# Altium PCB Master.PcbDoc (part 4 of 4)
Units mm, origin at the board's own origin, x right, y up, seen from the top; angles counter-clockwise.
Board outline 150 x 100 mm, 4 copper layers (Top Layer, GND-Layer, PWR-Layer, Bottom Layer), stack 1.586 mm thick; 231 components, 152 nets, 715 pads, 841 vias.
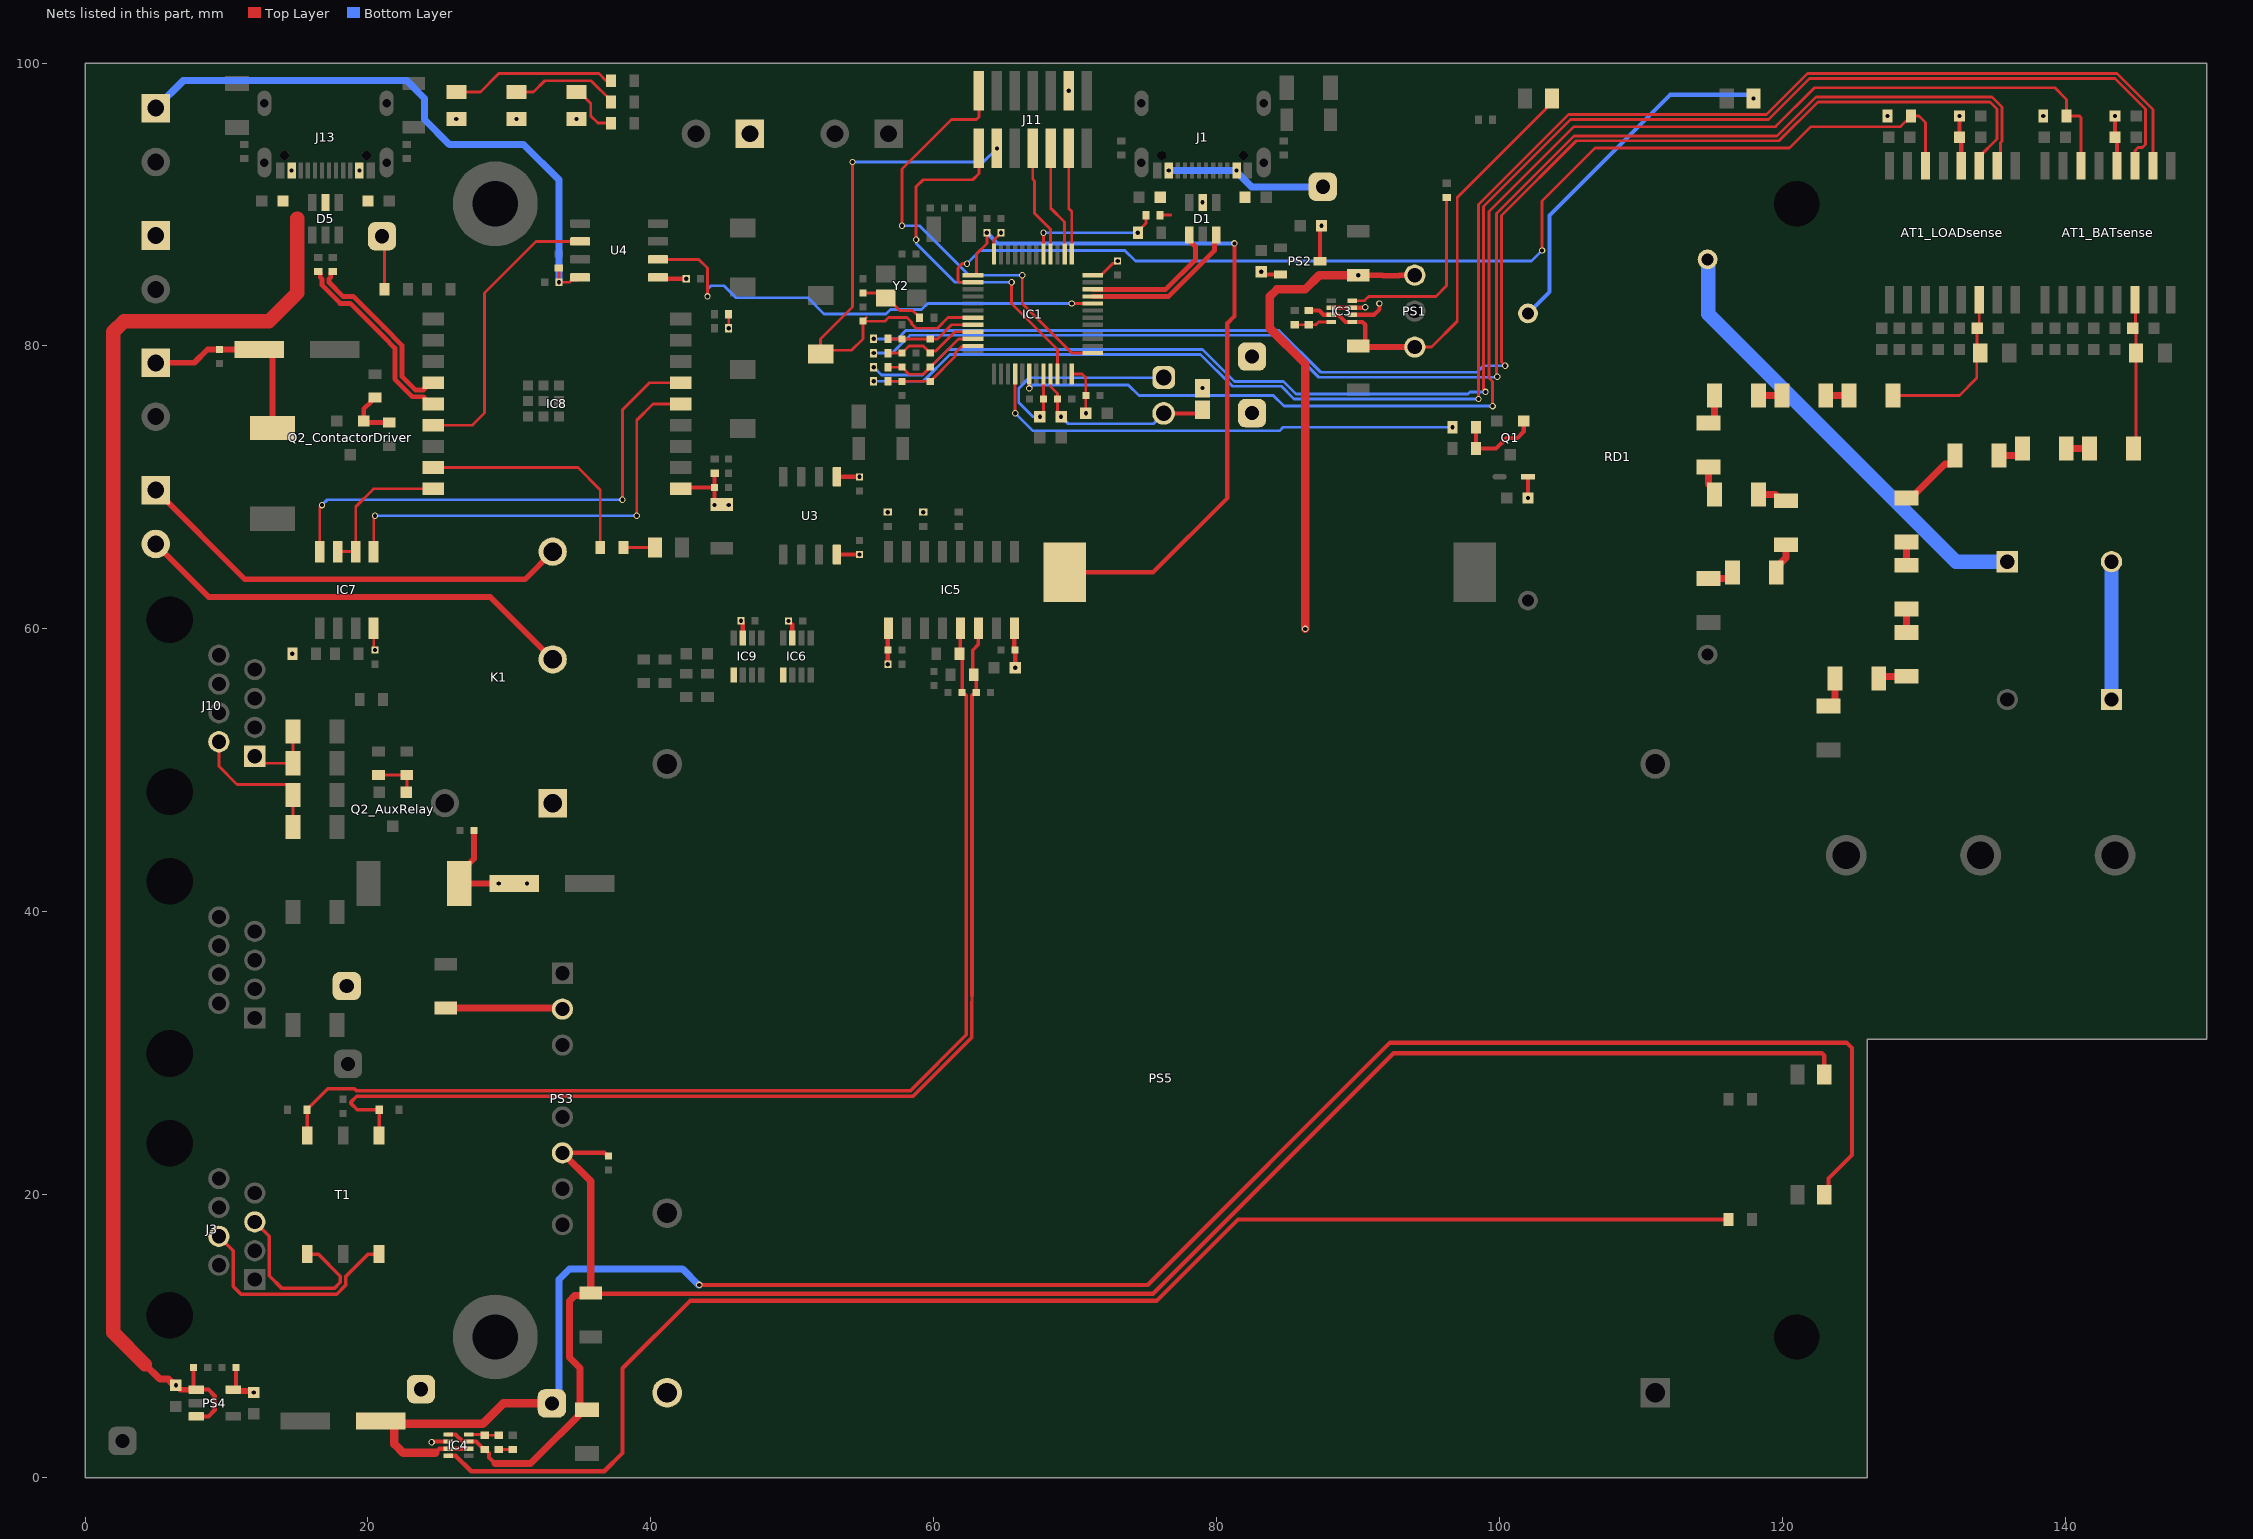
[diagram p5: the nets of this part, all layers, seen from the top]

## Via types
v1: diameter 0.45, hole 0.3, Top Layer to Bottom Layer, tented both sides, 841 vias

## Nets (pads, with @x,y where several pads share a name; then routed paths per layer and width w, separated by ;. In a path a pad name is that pad's centre, name@x,y a point inside that pad or via, vN(x,y) a via of type N, cw(c..) or ccw(c..) an arc to the next point about the centre after c; other vN are vias at no path point) (continued)
NetLED7_2: LED7.2 R34.2 | length 3.9
  Top Layer w0.2: LED7.2@34.75,97.95 34.95,97.95 35.75,97.15 35.75,96.25 36.25,95.75 R34.2@37.173,95.75
NetLED8_2: LED8.2 R35.2 | length 7.7
  Top Layer w0.2: LED8.2@30.5,97.95 31.7,97.95 32.5,98.75 35.773,98.75 37.173,97.35 R35.2@37.173,97.25
NetLED9_2: LED9.2 R36.2 | length 11.7
  Top Layer w0.2: LED9.2@26.25,97.95 27.95,97.95 29.25,99.25 36.323,99.25 36.823,98.75 R36.2@37.173,98.75
NetLED10_1: LED10.1 R57.1 | length 2.2
  Top Layer w0.2: R57.1@38.077,65.75 LED10.1@40.3,65.75
NetQ1_1: Q1.1 R43.1 R44.2 | length 6.1
  Top Layer w0.3: R43.1@98.327,74.25 98.327,73.2 R44.2@98.327,72.75 99.75,72.75 100.5,73.5 101.25,73.5 101.7,73.95 Q1.1@101.7,74.7
NetQ2_AuxRelay_1: Q2_AuxRelay.1 R67_AuxRelay.1 R68_AuxRelay.2 | length 3.2
  Top Layer w0.2: R68_AuxRelay.2@20.75,49.673 22.3,49.673 R67_AuxRelay.1@22.75,49.673 22.75,48.5 Q2_AuxRelay.1@22.7,48.45
NetQ2_ContactorDriver_1: Q2_ContactorDriver.1 R67_ContactorDriver.1 R68_ContactorDriver.2 | length 3.9
  Top Layer w0.341: R67_ContactorDriver.1@20.5,76.346 20.4,76.346 20.22,76.166 20.22,76.066 19.7,75.546 Q2_ContactorDriver.1@19.7,74.7 19.823,74.577 R68_ContactorDriver.2@21.5,74.577
NetR14_1: R14.1 R15.1 | length 1
  Top Layer w0.2: R14.1@29.25,2 R15.1@30.25,2
NetR47_BATsense_1: R47_BATsense.1 R48_BATsense.2 | length 2.2
  Top Layer w0.5: R48_BATsense.2@123.25,54.552 123.423,54.552 123.698,54.827 R47_BATsense.1@123.698,56.5
NetR47_BATsense_2: R47_BATsense.2 R49_BATsense.2 | length 2.2
  Top Layer w0.5: R47_BATsense.2@126.802,56.198 126.802,56.371 127.077,56.646 R49_BATsense.2@128.75,56.646
NetR47_LOADsense_1: R47_LOADsense.1 R48_LOADsense.2 | length 2
  Top Layer w0.5: R48_LOADsense.2@114.75,63.552 116.173,63.552 116.448,63.827 R47_LOADsense.1@116.448,64
NetR47_LOADsense_2: R47_LOADsense.2 R49_LOADsense.2 | length 2.2
  Top Layer w0.5: R47_LOADsense.2@119.552,64 119.552,64.325 120.25,65.023 R49_LOADsense.2@120.25,65.948
NetR49_BATsense_1: R49_BATsense.1 R50_BATsense.2 | length 1.6
  Top Layer w0.5: R49_BATsense.1@128.75,59.75 128.75,60.275 R50_BATsense.2@128.75,61.396
NetR49_LOADsense_1: R49_LOADsense.1 R50_LOADsense.2 | length 2.1
  Top Layer w0.5: R50_LOADsense.2@118.302,69.5 119.504,69.5 119.65,69.354 119.65,69.327 119.925,69.052 R49_LOADsense.1@120.25,69.052
NetR50_BATsense_1: R50_BATsense.1 R52_BATsense.1 | length 1.6
  Top Layer w0.5: R50_BATsense.1@128.75,64.5 R52_BATsense.1@128.75,66.146
NetR50_LOADsense_1: R50_LOADsense.1 R52_LOADsense.1 | length 2.1
  Top Layer w0.5: R52_LOADsense.1@114.75,71.448 114.75,70.246 114.896,70.1 114.923,70.1 115.198,69.825 R50_LOADsense.1@115.198,69.5
NetR51_BATsense_1: R51_BATsense.1 R52_BATsense.2 | length 4.9
  Top Layer w0.5: R52_BATsense.2@128.75,69.25 129.075,69.25 131.475,71.65 131.923,71.65 132.198,71.925 R51_BATsense.1@132.198,72.25
NetR51_BATsense_2: R51_BATsense.2 R53_BATsense.2 | length 2
  Top Layer w0.5: R51_BATsense.2@135.302,72.25 136.673,72.25 136.948,72.525 R53_BATsense.2@136.948,72.75
NetR51_LOADsense_1: R51_LOADsense.1 R52_LOADsense.2 | length 2.2
  Top Layer w0.5: R52_LOADsense.2@114.75,74.552 114.923,74.552 115.198,74.827 R51_LOADsense.1@115.198,76.5
NetR51_LOADsense_2: R51_LOADsense.2 R53_LOADsense.2 | length 1.6
  Top Layer w0.5: R51_LOADsense.2@118.302,76.5 R53_LOADsense.2@119.948,76.5
NetR53_BATsense_1: R53_BATsense.1 R54_BATsense.2 | length 1.6
  Top Layer w0.5: R53_BATsense.1@140.052,72.75 R54_BATsense.2@141.698,72.75
NetR53_LOADsense_1: R53_LOADsense.1 R54_LOADsense.2 | length 1.6
  Top Layer w0.5: R53_LOADsense.1@123.052,76.5 R54_LOADsense.2@124.698,76.5
NetRD1_2: RD1.2 RT2.1 | length 31.8
  Bottom Layer w1: RD1.2@114.75,85.663 114.75,82.25 132.25,64.75 RT2.1@135.884,64.75
NetRT1_1: RT1.1 RT2.2 | length 9.8
  Bottom Layer w1: RT1.1@143.25,55 RT2.2@143.25,64.75
NRST: C1.2 IC1.7 J11.12 S1.1 | length 38.7
  Top Layer w0.2: v1(54.25,93) 54.25,82.75 52,80.5 S1.1@52,79.425 52.266,79.691 54.191,79.691 55,80.5 C1.2@55,81.75 ; 55.25,82 C1.2@55,81.75 ; IC1.7@62.762,82 61,82 60.25,81.25 58.75,81.25 58.427,81.573 58.427,81.677 58.104,82 56.802,82 56.552,81.75 C1.2@55,81.75
  Bottom Layer w0.2: v1(54.25,93) 63.495,93 v1(64.46,93.965)
p3v3: AT1_BATsense.12 AT1_LOADsense.12 C14.2 C17.1 C18.2 C19.2 C20.2 C30.2 C31.2 C38.2 C48_BATsense.2 C48_LOADsense.2 C49_BATsense.2 C49_LOADsense.2 C59.2 FB1.1 IC1.24 IC1.36 IC1.48 IC5.9 J7.1 J11.3 LED7.1 LED8.1 LED9.1 PS2.2 R22.2 R23.2 R56_BATsense.1 R56_LOADsense.1 TP4.1 U3.1 U4.1 | length 22.3
  Top Layer w0.2: IC1.48@64.25,86.488 64.25,87.5 64.6,87.85 v1(64.75,88) ; IC1.24@69.75,78.012 70.488,78.012 70.738,77.762 C17.1@70.738,75.22 ; IC1.36@71.238,85 71.826,85 71.876,85.05 72.676,85.85 72.85,85.85 v1(73,86)
  Top Layer w0.3: U4.1@40.5,84.845 40.595,84.75 v1(42.5,84.75) ; U3.1@53.155,70.75 53.455,70.75 v1(54.75,70.75) ; v1(56.75,57.5) 56.75,59.983 IC5.9@56.805,60.038 ; v1(83.15,85.25) 83.35,85.05 PS2.2@84.5,85.05 ; v1(132.5,96.25) C49_LOADsense.2@132.5,94.75 132.635,94.615 AT1_LOADsense.12@132.635,92.725 ; v1(143.5,96.25) C49_BATsense.2@143.5,94.75 143.635,94.615 AT1_BATsense.12@143.635,92.725
  other v1: 56.75,68.25 59.25,68.25 70.75,75.25 79,77.026 26.25,96.05 30.5,96.05 34.75,96.05 127.423,96.25 138.423,96.25 69.54,98.035
p3v3_INV: C23.1 C39.2 C40.2 C41.2 C43.2 C54.2 C55.1 C60.2 IC4.2 IC4.7 IC6.3 IC7.8 IC8.1 IC9.3 J9.1 LED3.1 R33.2 R58.2 R59.2 R65.2 R66.2 TP5.1 U3.8 U4.8 | length 194.4
  Top Layer w0.2: IC7.8@20.405,60.038 20.405,58.595 v1(20.5,58.5) ; R58.2@33.5,85.5 33.5,84.75 v1(33.5,84.5) 34.25,84.5 34.395,84.645 34.8,84.645 U4.8@35,84.845 ; v1(45.5,81.25) R66.2@45.5,82.25
  Top Layer w0.3: 24.75,1.75 25.05,2.05 IC4.7@25.66,2.05 IC4.2@27.14,2.05 ; IC8.1@42.11,69.9 42.21,70 C55.1@44.5,70 ; v1(43.425,13.625) 75.125,13.625 92.25,30.75 124.523,30.75 124.9,30.373 124.9,22.8 123.25,21.15 123.25,20.3 LED3.1@122.95,20 ; R65.2@44.5,71 44.5,70.25 C55.1@44.5,70 ; C54.2@45,68.8 44.8,68.8 44.5,69.1 C55.1@44.5,70 ; v1(46.375,60.574) 46.5,60.449 IC9.3@46.5,59.35 ; v1(49.737,60.554) 49.987,60.304 49.987,59.363 IC6.3@50,59.35 ; U3.8@53.155,65.25 53.455,65.25 v1(54.75,65.25)
  Top Layer w0.6: C23.1@20.92,4 C23.1@21.574,4 ; 24.75,1.75 22.5,1.75 21.874,2.376 21.874,3.7 C23.1@21.574,4 ; TP5.1@33,5.25 29.561,5.25 28.111,3.8 21.774,3.8 C23.1@21.574,4
  Bottom Layer w0.5: J9.1@5,96.81 6.94,98.75 22.75,98.75 24,97.5 24,96 25.75,94.25 31,94.25 33.5,91.75 v1(33.5,84.5) ; TP5.1@33,5.25 33.5,5.75 33.5,14 34.25,14.75 42.25,14.75 43.375,13.625 v1(43.425,13.625)
  other v1: 14.65,58.25 44.5,68.75 45.5,68.75
p3v3_INV_PS: C24.2 C25.2 IC4.3 IC4.5 LED4.1 PS3.6 R9.2 R13.2 | length 132.3
  Top Layer w0.3: IC4.5@25.66,3.05 26.2,3.05 26.7,2.55 IC4.3@27.14,2.55 27.65,2.55 28.2,2 R13.2@28.25,2 ; R13.2@28.3,2 28.55,1.75 28.55,1.432 28.982,1 ; PS3.6@33.75,22.96 36.724,22.96 36.834,22.85 36.9,22.85 C25.2@37,22.75 ; C24.2@35.75,13 75.5,13 92.5,30 122.774,30 122.95,29.824 LED4.1@122.95,28.5
  Top Layer w0.5: 28.982,1 31.5,1 R9.2@35.5,5 ; PS3.6@33.75,22.96 35.75,20.96 C24.2@35.75,13 ; R9.2@35.5,4.802 35.275,4.802 35,5.077 35,7.75 34.25,8.5 34.25,12.5 34.62,12.87 35.57,12.87 C24.2@35.75,13.05
p3v3_INV_USB: C27.1 C29.2 IC4.6 PS4.5 TP6.1 | length 4.3
  Top Layer w0.2: PS4.5@10.475,6.225 PS4.5@10.675,6.425
  Top Layer w0.3: PS4.5@10.675,6.425 C29.2@10.675,7.775 ; v1(24.5,2.5) 24.55,2.55 IC4.6@25.66,2.55
  Top Layer w0.4: PS4.5@10.475,6.225 10.575,6.125 11.825,6.125 v1(11.925,6.025)
p3v3A: C9.2 C10.1 FB1.2 IC1.21 P1.2 | length 13.9
  Top Layer w0.2: IC1.21@68.25,78.012 68.25,77.137 68.75,76.637 C9.2@68.75,76.25 68.75,75.25 v1(69,75)
  Top Layer w0.3: P1.2@76.25,75.23 78.756,75.23 FB1.2@79,75.474
  Bottom Layer w0.2: v1(69,75) 69.5,74.5 75.52,74.5 P1.2@76.25,75.23
p3v3Ref: C15.2 C16.1 IC1.20 P1.1 | length 16.6
  Top Layer w0.2: v1(67.5,75) 67.75,75.25 67.75,77.274 IC1.20@67.75,78.012
  Bottom Layer w0.2: v1(67.5,75) 67,75 66,76 66,77 66.75,77.75 76.23,77.75 P1.1@76.25,77.77
p5v0: C13.2 C32.2 C33.2 C44.1 D4.1 IC3.2 IC3.7 IC5.16 LED1.1 PS2.3 RD1.3 TP3.1 | length 34.9
  Top Layer w0.3: IC5.16@65.695,60.038 65.695,58.555 C32.2@65.75,58.5 v1(65.75,57.25) ; PS2.3@87.3,86 87.3,88.4 v1(87.4,88.5) ; IC3.2@88.11,82.7 90.475,82.7 v1(90.502,82.728) ; v1(102,69.25) 102,70.553 D4.1@102,70.75
  Bottom Layer w0.3: RD1.3@102,82.3 103.525,83.825 103.525,89.225 112.05,97.75 117.7,97.75 v1(117.95,97.5)
p5v0_INV_USB: C26.1 C28.2 C56.2 C57.2 D5.5 J13.A4/B9 J13.A9/B4 PS4.1 PS4.3 R11.1 TP8.1 | length 107.1
  Top Layer w0.2: TP8.1@21,87.75 21.173,87.577 R11.1@21.173,84
  Top Layer w0.3: C28.2@7.675,7.775 7.675,6.375 PS4.1@7.825,6.225 ; PS4.3@7.875,4.325 8.725,4.325 9.175,4.775 9.175,5.775 8.725,6.225 PS4.1@7.875,6.225
  Top Layer w0.4: v1(6.425,6.525) 6.725,6.225 PS4.1@7.875,6.225
  Top Layer w0.5: 4.25,8 5.288,6.962 5.882,6.962 6.17,6.675 6.275,6.675 v1(6.425,6.525)
  Top Layer w1: 4.25,8 2,10.25 2,81 2.75,81.75 13,81.75 15,83.75 15,89
  other v1: 14.6,92.395 19.4,92.395
p5v0_PS: C12.2 IC3.3 IC3.5 LED2.1 PS1.3 R10.2 | length 32.4
  Top Layer w0.2: PS1.3@94,79.92 95.17,79.92 97,81.75 97,90.5 103.3,96.8 103.3,97.1 LED2.1@103.7,97.5
  Top Layer w0.3: R10.2@86.5,82.5 87.25,82.5 87.55,82.2 88.6,82.2 89.1,81.7 90.3,81.7 90.5,81.5 90.5,80.35 C12.2@90.15,80
  Top Layer w0.4: C12.2@90,80 90.15,80 90.23,79.92 PS1.3@94,79.92
p5v0_USB: C2.2 C3.2 D1.5 IC3.6 J1.A4/B9 J1.A9/B4 R2.1 TP2.1 | length 14.7
  Top Layer w0.2: R2.1@76,89.25 76.75,89.25
  Top Layer w0.3: IC3.6@89.59,82.2 91.112,82.2 91.5,82.588 v1(91.5,83)
  Bottom Layer w0.5: v1(76.6,92.395) v1(81.4,92.395) 81.4,92.311 82.461,91.25 TP2.1@87.5,91.25
  other v1: 79,90.15
p12v0: C11.2 C22.2 C62_AuxRelay.1 C62_ContactorDriver.1 C68_AuxRelay.2 C68_ContactorDriver.2 D6_AuxRelay.1 D6_ContactorDriver.1 J4.1 J8.1 K1.1 PS1.1 PS3.2 PS5.5 TP1.1 | length 65.8
  Top Layer w0.4: J4.1@5,78.81 7.726,78.81 8.666,79.75 C62_ContactorDriver.1@12.33,79.75 12.85,79.75 13.25,79.35 D6_ContactorDriver.1@13.25,74.205 ; C68_AuxRelay.2@27.5,45.75 27.5,43.75 27.15,43.4 27.115,43.4 26.455,42.74 D6_AuxRelay.1@26.455,42 v1(29.25,42) C62_AuxRelay.1@30.33,42 ; v1(90,85) 91.714,85 91.764,84.95 92.877,84.95 92.927,85 PS1.1@94,85
  Top Layer w0.5: C22.2@25.5,33.2 33.67,33.2 PS3.2@33.75,33.12
  Top Layer w0.6: v1(86.25,60) 86.25,78.75 83.75,81.25 83.75,83.5 84.25,84 86.25,84 87.25,85 v1(90,85)
  other v1: 31.25,42
pBat: C21.2 IC1.1 U1.1 | length 53.2
  Top Layer w0.2: IC1.1@62.762,85 62.967,85 63.017,85.05 63.017,86.517 63.75,87.25 v1(63.75,88)
  Top Layer w0.3: U1.1@69.25,64 75.5,64 80.75,69.25 80.75,81.605 81.25,82.105 v1(81.25,87.25)
  Bottom Layer w0.3: v1(63.75,88) 64.5,87.25 v1(81.25,87.25)
PCC_EN: IC1.16 R43.2 | length 34.3
  Top Layer w0.2: v1(65.75,75.25) IC1.16@65.75,78.012
  Bottom Layer w0.2: v1(65.75,75.25) 67,74 84.428,74 84.678,74.25 v1(96.673,74.25)
PR1_3V3_INV: IC4.4 R13.1 R14.2 | length 2.1
  Top Layer w0.2: IC4.4@27.14,3.05 R13.1@28.25,3.05 ; R13.1@28.25,3 R14.2@29.25,3
PR1_5V0: IC3.4 R10.1 R12.2 | length 2.7
  Top Layer w0.2: R12.2@85.5,81.5 R10.1@86.5,81.5 87,81.5 87.2,81.7 IC3.4@88.11,81.7
RDTX_N: C36.2 D3.2 IC5.13 R25.2 T1.6 | length 79.8
  Top Layer w0.247: T1.6@15.7,24.2 D3.2@15.7,26 15.7,26.05 17.15,27.5 19.047,27.5 19.182,27.365 58.365,27.365 62.302,31.302 62.302,33.65 62.3,33.652 62.3,34.05
  Top Layer w0.25: IC5.13@61.885,60.038 61.885,58.308 R25.2@61.827,58.25 62,58.077 C36.2@62,55.5 62.125,55.375 62.227,55.375 62.3,55.302 62.3,34.05
RDTX_P: C34.1 D2.1 IC5.14 R24.2 T1.4 | length 79.2
  Top Layer w0.247: T1.4@20.79,24.19 D2.1@20.79,25.99 ; D2.1@20.8,26 20.79,26 19.25,26 18.801,26.449 18.801,26.551 19.218,26.968 58.53,26.968 62.699,31.137 62.699,33.65 62.7,33.652 62.7,34.05
  Top Layer w0.25: 62.7,34.05 62.7,55.302 62.773,55.375 62.875,55.375 C34.1@63,55.5 63,56.577 R24.2@62.827,56.75 62.75,56.827 62.75,58.5 63.155,58.905 IC5.14@63.155,60.038
RELAY_A: J5.2 K1.2 | length 31.4
  Top Layer w0.4: J5.2@5,66 8.75,62.25 28.65,62.25 K1.2@33.06,57.84
RELAY_B: J5.1 K1.3 | length 31.5
  Top Layer w0.4: J5.1@5,69.81 11.31,63.5 31.1,63.5 K1.3@33.06,65.46
RS485_A: J10.1 R39.2 R41.2 | length 5.2
  Top Layer w0.2: J10.1@12,51 12.5,50.5 R41.2@14.698,50.5 R39.2@14.698,52.75
RS485_B: J10.2 R40.2 R42.2 | length 10.3
  Top Layer w0.2: J10.2@9.46,52.02 9.46,50.29 10.75,49 14.273,49 14.698,48.575 R42.2@14.698,48.25 R40.2@14.698,46
RS485_DI: IC7.4 IC8.6 | length 36
  Top Layer w0.2: IC7.4@16.595,65.462 16.595,68.566 16.75,68.721 v1(16.75,68.75) ; v1(37.985,69.125) 37.985,75.485 39.9,77.4 IC8.6@42.11,77.4
  Bottom Layer w0.2: v1(16.75,68.75) 17.125,69.125 v1(37.985,69.125)
RS485_EN: IC7.2 IC7.3 IC8.18 | length 10.4
  Top Layer w0.2: IC7.3@17.865,65.462 18.215,65.462 IC7.2@19.135,65.462 19.135,68.635 20.4,69.9 IC8.18@24.61,69.9
RS485_RO: IC7.1 IC8.5 | length 31.4
  Top Layer w0.2: IC7.1@20.405,65.462 20.405,67.837 20.5,67.932 v1(20.5,68) ; v1(39,68) 39,74.75 40.15,75.9 IC8.5@42.11,75.9
  Bottom Layer w0.2: v1(20.5,68) v1(39,68)
SHDN1: IC6.5
SHDN2: IC9.5
ST_5V: IC3.8 R7.1 | length 13.3
  Top Layer w0.2: IC3.8@89.59,83.2 90.45,83.2 90.75,83.5 95.5,83.5 96.25,84.25 R7.1@96.25,90.5
ST_INV_3V3: IC4.8 R17.2 | length 101.8
  Top Layer w0.3: IC4.8@25.66,1.55 26.2,1.55 27.3,0.45 36.7,0.45 38,1.75 38,7.732 42.768,12.5 75.75,12.5 81.5,18.25 R17.2@116.173,18.25
SWCLK: IC1.38 J11.6 | length 7.9
  Top Layer w0.2: J11.6@68.27,93.965 68.27,89.73 69.25,88.75 IC1.38@69.25,86.488
SWDIO: IC1.37 J11.4 | length 7.6
  Top Layer w0.2: J11.4@69.54,93.965 69.54,89.71 69.75,89.5 IC1.37@69.75,86.488
SWO: IC1.40 J11.8 | length 8
  Top Layer w0.2: J11.8@67,93.965 67,91.78 67.125,91.655 67.125,89.375 68.25,88.25 IC1.40@68.25,86.488
TPL_N: J3.5 T1.1 | length 13.2
  Top Layer w0.247: J3.5@12,18.08 13.023,17.056 13.023,14.276 13.926,13.373 17.623,13.373 18.051,13.801 18.051,14.25 16.491,15.81 T1.1@15.71,15.81
TPL_P: J3.4 T1.3 | length 16
  Top Layer w0.247: J3.4@9.46,17.06 10.483,16.036 10.483,13.516 11.023,12.976 17.788,12.976 18.448,13.637 18.448,14.25 20.008,15.81 T1.3@20.79,15.81
UART_ESP_RX: IC8.15 U4.6 | length 20.7
  Top Layer w0.2: IC8.15@24.61,74.4 27.4,74.4 28.25,75.25 28.25,83.75 31.885,87.385 U4.6@35,87.385
UART_RX_ESP: IC1.32 U4.2 | length 34.7
  Top Layer w0.2: U4.2@40.5,86.115 43.385,86.115 44,85.5 v1(44,83.5) ; v1(69.75,83) 70.5,83 IC1.32@71.238,83
  Bottom Layer w0.2: v1(44,83.5) 44.005,83.505 44.005,84.005 44.25,84.25 45.177,84.25 46.023,83.403 51.097,83.403 52.25,82.25 56.61,82.25 56.927,82.567 59.14,82.567 59.573,83 v1(69.75,83)
USB_ESP32_N: IC8.13 R61.2 | length 13
  Top Layer w0.341: R61.2@17.5,85.25 17.45,85.25 17.371,85.171 17.371,84.847 17.246,84.722 17.246,84.489 18.234,83.5 18.953,83.5 21.106,81.347 22.401,80.052 22.401,77.843 23.348,76.896 23.931,76.896 24.03,76.995 24.03,77.12 24.31,77.4 IC8.13@24.61,77.4
USB_ESP32_P: IC8.14 R63.2 | length 13.8
  Top Layer w0.341: R63.2@16.5,85.25 16.55,85.25 16.629,85.171 16.629,84.847 16.755,84.722 16.755,84.285 18.031,83.009 18.75,83.009 20.759,81 21.106,80.653 21.91,79.849 21.91,77.64 23.145,76.405 23.931,76.405 24.03,76.305 24.03,76.18 24.31,75.9 IC8.14@24.61,75.9
USB_STM32_N: D1.3 IC1.33 | length 11.1
  Top Layer w0.341: IC1.33@71.238,83.5 71.243,83.505 76.602,83.505 79.836,86.738 79.836,87.736 D1.3@79.95,87.85
USB_STM32_P: D1.1 IC1.34 | length 10.1
  Top Layer w0.341: IC1.34@71.238,84 71.242,83.996 76.398,83.996 78.5,86.097 78.5,86.997 78.179,87.317 78.179,87.42 78.05,87.55 D1.1@78.05,87.85
USR_LED: IC8.17 R57.2 | length 16.5
  Top Layer w0.2: IC8.17@24.61,71.4 34.85,71.4 36.423,69.827 R57.2@36.423,65.75
V_BATsense_N: C69_BATsense.1 C70_BATsense.2 IC1.11 R45_BATsense.2 | length 7.2
  Top Layer w0.2: R45_BATsense.2@56.75,77.5 C70_BATsense.2@59.75,77.5 59.9,77.65 61.5,79.25 61.5,79.5 61.95,79.95 62.712,79.95 IC1.11@62.762,80
V_BATsense_P: C70_BATsense.1 C71_BATsense.2 IC1.10 R46_BATsense.2 | length 7.3
  Top Layer w0.2: R46_BATsense.2@56.75,78.5 57,78.5 C71_BATsense.2@57.75,78.5 58.25,78 59.25,78 60,78.75 60.005,78.75 61.755,80.5 IC1.10@62.762,80.5
V_HV_BATsense: AT1_BATsense.6 C45_BATsense.2 R54_BATsense.1 R55_BATsense.2 | length 10.7
  Top Layer w0.2: C45_BATsense.2@144.75,81.25 144.946,81.446 144.946,83.234 AT1_BATsense.6@144.905,83.275 ; R54_BATsense.1@144.802,72.75 144.973,72.921 R55_BATsense.2@144.973,79.5 C45_BATsense.2@144.973,81.25
V_HV_LOADsense: AT1_LOADsense.6 C45_LOADsense.2 R54_LOADsense.1 R55_LOADsense.2 | length 12.1
  Top Layer w0.2: R54_LOADsense.1@127.802,76.5 132.5,76.5 133.723,77.723 133.723,79.5 133.75,79.527 C45_LOADsense.2@133.75,81.25 133.905,81.405 AT1_LOADsense.6@133.905,83.275
V_LOADsense_N: C69_LOADsense.1 C70_LOADsense.2 IC1.9 R45_LOADsense.2 | length 7
  Top Layer w0.2: R45_LOADsense.2@56.75,79.5 57,79.5 ; 57,79.5 C69_LOADsense.1@57.75,79.5 58.25,80 59.25,80 C70_LOADsense.2@59.75,79.5 59.887,79.637 60.137,79.637 61.5,81 IC1.9@62.762,81
V_LOADsense_P: C70_LOADsense.1 C71_LOADsense.2 IC1.8 R46_LOADsense.2 | length 6.4
  Top Layer w0.2: R46_LOADsense.2@56.75,80.5 57,80.5 C71_LOADsense.2@57.75,80.5 60.255,80.5 61.255,81.5 IC1.8@62.762,81.5
V_SENSE_BAT_DIAG: AT1_BATsense.14 IC1.18 R56_BATsense.2 | length 98.8
  Top Layer w0.2: v1(66.75,77) IC1.18@66.75,78.012 ; v1(99.5,75.75) 99.5,77.48 99.25,77.73 99.25,89.5 105.25,95.5 119.5,95.5 122.25,98.25 139.25,98.25 140.077,97.423 R56_BATsense.2@140.077,96.25 141,96.25 141.095,96.155 AT1_BATsense.14@141.095,92.725
  Bottom Layer w0.2: v1(66.75,77) 67,77.25 73.75,77.25 74.5,76.5 84,76.5 84.75,75.75 v1(99.5,75.75)
V_SENSE_LOAD_DIAG: AT1_LOADsense.14 IC1.2 R56_LOADsense.2 | length 80.8
  Top Layer w0.2: v1(62.343,85.818) 62.015,85.818 61.7,85.503 61.7,84.617 61.817,84.5 IC1.2@62.762,84.5 ; v1(103,86.75) 103,90.25 106.75,94 120.5,94 122,95.5 128.333,95.5 128.733,95.9 128.827,95.9 129.077,96.15 R56_LOADsense.2@129.077,96.25 129.647,96.25 130.095,95.802 AT1_LOADsense.14@130.095,92.725
  Bottom Layer w0.2: v1(62.343,85.818) 63.275,86.75 73.5,86.75 74.25,86 102.25,86 v1(103,86.75)
V_SENSE_USB: IC1.41 R2.2 R4.2 | length 9.6
  Top Layer w0.2: IC1.41@67.75,86.488 v1(67.75,88) ; R4.2@74.423,88.1 75,88.677 R2.2@75,89.25
  Bottom Layer w0.2: v1(67.75,88) v1(74.423,88)
VCP_RX: IC1.25 J11.13 | length 31.2
  Top Layer w0.2: v1(57.75,88.5) 57.75,92.5 61.25,96 63,96 63.19,96.19 J11.13@63.19,98.035 ; v1(66.25,85) 66.25,83 69.75,79.5 IC1.25@71.238,79.5
  Bottom Layer w0.2: v1(57.75,88.5) 58.99,88.5 62.49,85 v1(66.25,85)
VCP_TX: IC1.22 J11.14 | length 26.3
  Top Layer w0.2: v1(58.75,87.5) 58.75,91.25 59.25,91.75 62.75,91.75 63.19,92.19 J11.14@63.19,93.965 ; v1(65.5,84.5) 65.5,83 68.75,79.75 IC1.22@68.75,78.012
  Bottom Layer w0.2: v1(58.75,87.5) 58.755,87.495 58.755,87.245 61.5,84.5 v1(65.5,84.5)
VU_BATsense_N: AT1_BATsense.10 R45_BATsense.1 | length 115.1
  Top Layer w0.2: v1(98.5,76.25) 98.5,89.995 104.855,96.35 118.855,96.35 121.755,99.25 143.649,99.25 145.547,97.352 145.649,97.249 146.175,96.724 AT1_BATsense.10@146.175,92.725
  Bottom Layer w0.2: v1(55.75,77.5) 59.25,77.5 61.15,79.4 78.855,79.4 81.108,77.147 84.57,77.147 85.467,76.25 97.75,76.25 v1(98.5,76.25)
VU_BATsense_P: AT1_BATsense.11 R46_BATsense.1 | length 114.7
  Top Layer w0.2: v1(99,76.75) 99,76.784 98.85,76.934 98.85,89.85 105,96 119,96 121.9,98.9 143.504,98.9 145.402,97.002 145.65,96.754 145.65,94.246 145.427,94.023 145.128,94.023 144.905,93.8 AT1_BATsense.11@144.905,92.725
  Bottom Layer w0.2: v1(55.75,78.5) 56.3,77.95 59.205,77.95 61.005,79.75 79,79.75 81.253,77.497 84.715,77.497 85.612,76.6 97.75,76.6 97.9,76.75 v1(99,76.75)
VU_LOADsense_N: AT1_LOADsense.10 R45_LOADsense.1 | length 101.1
  Top Layer w0.2: v1(99.826,77.826) 99.778,77.874 99.778,78.712 99.775,78.715 99.775,89.36 105.265,94.85 119.605,94.85 122.355,97.6 134.795,97.6 135.5,96.895 135.5,94.475 135.4,94.375 135.4,92.95 AT1_LOADsense.10@135.175,92.725
  Bottom Layer w0.2: v1(55.75,79.5) 57.059,79.5 58.309,80.75 84.25,80.75 87.209,77.791 99.791,77.791 v1(99.826,77.826)
VU_LOADsense_P: AT1_LOADsense.11 R46_LOADsense.1 | length 100.1
  Top Layer w0.2: v1(100.383,78.602) 100.125,78.86 100.125,89.215 105.41,94.5 119.75,94.5 122.5,97.25 134.65,97.25 135.15,96.75 135.15,94.62 133.905,93.375 AT1_LOADsense.11@133.905,92.725
  Bottom Layer w0.2: v1(55.75,80.5) 57.422,80.5 58.022,81.1 84.395,81.1 87.354,78.141 98.391,78.141 98.852,78.602 v1(100.383,78.602)
XTAL_OUT: C5.2 R1.2 Y2.1 | length 4.7
  Top Layer w0.2: C5.2@55,83.75 56.24,83.75 Y2.1@56.598,83.392 ; Y2.1@56.698,83.392 57.59,82.5 58.5,82.5 58.8,82.2 58.85,82.2 59,82.05 R1.2@59,82
pads on no net: AT1_BATsense.4 AT1_LOADsense.4 IC8.11 IC8.12 J1.A8 J1.B8 J1.MH1 J1.MH2 J2.1 J2.2 J2.7 J2.8 J2.9 J2.10 J3.1 J3.2 J3.3 J3.6 J3.7 J3.8 J3.9 J3.10 J10.3 J10.4 J10.5 J10.6 J10.7 J10.8 J10.9 J10.10 J11.1 J11.2 J11.9 J11.10 J13.MH1 J13.MH2 PS3.3 PS3.5 PS3.8 PS5.3 T1.2

## Polygon pours and split planes (outlines as drawn)
GND on Top Layer "GND_L01_P017" (solid, pour order 17): 55.5,0 97,0 97,54 104,61 104,89.5 108.25,93.75 123.75,93.75 125.6,91.9 150,91.9 150,100 55.5,100
GND_INV on Top Layer "GND_INV_L01_P016" (solid, pour order 16): 55.5,0 55.5,100 0,100 0,0
p5v0_INV_USB on Top Layer "P5V0_INV_USB_L01_P000" (solid, pour order 0): 18.25,88.5 18.25,86.25 22.5,86.25 22.5,89.25 21.1,89.25 20.5,89.85 20.5,90.75 19.85,90.75 19.75,90.85 19.75,93.111 14.25,93.111 14.25,88.5
p5v0_USB on Top Layer "P5V0_USB_L01_P001" (solid, pour order 1): 76.25,88.5 81.75,88.5 81.75,93.125 76.25,93.125
GND on GND-Layer "GND_L02_P002" (solid, pour order 2): 0,0 97,0 97,54 104,61 104,89.5 108.25,93.75 123.75,93.75 125.6,91.9 150,91.9 150,100 0,100
HV_BAT- on GND-Layer "HV_BAT-_L02_P003" (solid, pour order 3): 125.5,77 150,77 150,85 125.5,85
GND on Bottom Layer "GND_L04_P006" (solid, pour order 6): 55.5,0 97,0 97,54 104,61 104,89.5 108.25,93.75 123.75,93.75 125.6,91.9 150,91.9 150,100 55.5,100
GND_INV on Bottom Layer "GND_INV_L04_P004" (solid, pour order 4): 55.5,0 55.5,100 0,100 0,0
p3v3 on PWR-Layer "P3V3_L03_P011" (solid, pour order 11): 87.75,89.5 104,89.5 108.25,93.75 123.75,93.75 125.6,91.9 150,91.9 150,100 24,100 24,82.75 29.25,82.75 32,85.5 36.75,85.5 39,83.25 45.5,83.25 49.25,79.5 49.25,73.5 56,66.75 56,56.25 65.25,56.25 65.25,61 69,64.75 75.5,64.75 80,69.25 80,75.75 81.5,77.25 83.25,77.25 88.3,82.3 88.3,83.2 84,87.5 84,91.5 85.5,93 87,93 87.75,92.25
p12v0 on PWR-Layer "P12V0_L03_P012" (solid, pour order 12): 0,23.5 0.25,23.25 22.25,23.25 22.25,9.5 24.25,7.5 26.25,7.5 27.5,6.25 27.5,0 97,0 97,54 104,61 104,66.75 89.5,66.75 79,56.25 56,56.25 53,53.25 53,20.5 45.75,13.25 43.25,13.25 39.75,16.75 39.75,31.25 36.25,34.75 36.25,50.75 31.25,55.75 13.5,55.75 13.5,67 24,77.5 24,100 0,100
p5v0_USB on PWR-Layer "P5V0_USB_L03_P010" (solid, pour order 10): 90.5,83.2 88.3,83.2 84,87.5 84,91.5 85.5,93 87,93 87.75,92.25 87.75,89.5 87.25,89.5 86.65,88.9 86.65,88.1 87.25,87.5 92.5,87.5 92.5,82.25 91.45,82.25 91.306,82.394
p5v0 on PWR-Layer "P5V0_L03_P009" (solid, pour order 9): 88.3,83.2 88.3,82.3 83.25,77.25 81.5,77.25 80,75.75 80,69.25 75.5,64.75 69,64.75 65.25,61 65.25,56.25 79,56.25 89.5,66.75 104,66.75 104,89.5 87.25,89.5 86.65,88.9 86.65,88.1 87.25,87.5 92.5,87.5 92.5,82.25 91.45,82.25 90.5,83.2
p3v3_INV on PWR-Layer "P3V3_INV_L03_P008" (solid, pour order 8): 39.75,16.75 43.25,13.25 45.75,13.25 53,20.5 53,53.25 56,56.25 56,66.75 49.25,73.5 49.25,79.5 45.5,83.25 39,83.25 36.75,85.5 32,85.5 29.25,82.75 24,82.75 24,77.5 13.5,67 13.5,55.75 31.25,55.75 36.25,50.75 36.25,34.75 39.75,31.25
p3v3_INV_USB on PWR-Layer "P3V3_INV_USB_L03_P007" (solid, pour order 7): 22.25,9.5 22.25,9.75 0,9.75 0,0 27.5,0 27.5,6.235 26.235,7.5 24.25,7.5

## Other copper
Top Layer:
  pour cut-out: 0,9.75 22.25,9.75 22.25,23.25 15.25,23.25 14.75,23.75 14.75,25.25 0,25.25
  pour cut-out: 112.5,87.5 116.75,87.5 119.25,85 150,85 150,91.75 125.75,91.75 123.75,93.75 108.25,93.75 104,89.5 104,61 97,54 97,0 126,0 126,40 118,40 108.75,49.25 108.75,51.5 112.5,55.25
GND-Layer:
  pour cut-out: 0,9.75 22.25,9.75 22.25,23.25 15.25,23.25 14.75,23.75 14.75,25.25 0,25.25
  pour cut-out: 112.5,87.5 116.75,87.5 119.25,85 150,85 150,91.75 125.75,91.75 123.75,93.75 108.25,93.75 104,89.5 104,61 97,54 97,0 126,0 126,40 118,40 108.75,49.25 108.75,51.5 112.5,55.25
PWR-Layer:
  pour cut-out: 0,9.75 22.25,9.75 22.25,23.25 15.25,23.25 14.75,23.75 14.75,25.25 0,25.25
  pour cut-out: 112.5,87.5 116.75,87.5 119.25,85 150,85 150,91.75 125.75,91.75 123.75,93.75 108.25,93.75 104,89.5 104,61 97,54 97,0 126,0 126,40 118,40 108.75,49.25 108.75,51.5 112.5,55.25
Bottom Layer:
  pour cut-out: 0,9.75 22.25,9.75 22.25,23.25 15.25,23.25 14.75,23.75 14.75,25.25 0,25.25
  pour cut-out: 112.5,87.5 116.75,87.5 119.25,85 150,85 150,91.75 125.75,91.75 123.75,93.75 108.25,93.75 104,89.5 104,61 97,54 97,0 126,0 126,40 118,40 108.75,49.25 108.75,51.5 112.5,55.25

## Silkscreen, mask and mechanical layers (free items; w line width, h text height)
Top Overlay:
  drawing of 60 lines, arcs and shapes, not listed
  text "STM P" at 95.5,97.02 h1.8
  text "STM U" at 109.75,97.02 h1.8
  text "STATUS" at 28.75,93.52 h1.8
  text "STM" at 85.5,93.52 h1.8
  text "ESP" at 23.5,93.27 h1.8
  text "5V0 U" at 88.75,90.77 h1.8
  text "GND 3V3" at 41.75,89.5 h1.8
  text "AUX IO" at 52.5,89.5 h1.8
  text "FlexBMS Master / V1.0" at 93.5,88.184 h4
  text "ESP BOOT" at 48.75,86.02 h1.8
  text "3V3 / GND / INV" at 10,85.5 h1.8
  text "5V0 INV U" at 19.5,85.02 h1.8
  text "12V / GND" at 9.25,83.52 h1.8
  text "RST" at 46.75,81.02 h1.8
  text "3V3 REF JUMPER" at 74.25,79.75 h1.8
  text "3V3" at 84,78.77 h1.8
  text "ESP RST" at 48.25,76.52 h1.8
  text "CONT" at 9.25,75.27 h1.8
  text "5V0" at 84,74.77 h1.8
  text "CR2032" at 82,72.5 h1.8
  text "AUX / RELAY" at 9.25,63.75 h1.8
  text "ESP LED" at 36,63.27 h1.8
  text "RS485" at 13.75,55.02 h1.8
  text "LOAD+" at 130.25,48.533 h3
  text "BAT+" at 121,48.5 h3
  text "BAT-" at 142,48.5 h3
  text "CAN" at 13.75,35.52 h1.8
  text "12V" at 20.5,34 h1.8
  text "GND" at 20.5,28.77 h1.8
  text "3V3 INV P" at 115,23.02 h1.8
  text "3V3 INV U" at 115,14.77 h1.8
  text "TPL" at 14,13.26 h1.8
  text "3V3 INV U" at 24.23,8 h1.8 r90
  text "3V3 INV" at 33.73,7 h1.8 r90
  text "GND INV" at 4.25,2.02 h1.8
Bottom Overlay:
  drawing of 35 lines, arcs and shapes, not listed
  text "3V3" at 12.041,95.783 h3
  text "INV" at 1,92.799 h3 r270
  text "G" at 9.276,91.973 h3
  text "G" at 42.283,90.724 h3 r270
  text "3V3" at 46.033,88.459 h3 r270
  text "Mounting / M3" at 120.524,87.25 h3
  text "12V" at 11.961,86.75 h3
  text "USB STM" at 77.783,86.741 h3 r270
  text "USB ESP" at 16.033,86.699 h3 r270
  text "G" at 9.276,83.033 h3
  text "AUX IO1" at 55.783,82.904 h3 r270
  text "DEBUG STM" at 65.283,82.713 h3 r270
  text "AUX IO2" at 52.033,82.552 h3 r270
  text "Mounting / M3" at 37.274,79.75 h3
  text "CONTACTOR" at 24.317,76.033 h3
  text "AUX RELAY" at 22.543,67.033 h3
  text "RS485" at 8.25,53.533 h3
  text "FlexBMS Master / V1.0 /  / Bram Bremer / 09/07/2026" at 96,49.475 h4
  text "1000V MAX" at 140.5,48.033 h3
  text "CAN" at 7,35.033 h3
  text "BAT+" at 123.5,32.5 h3 r270
  text "LOAD+" at 133.033,32.5 h3 r270
  text "BAT-" at 142.5,32.5 h3 r270
  text "TPL" at 6.5,16.75 h3
  text "Mounting / M3" at 120.274,7.75 h3
  text "Mounting M3" at 37.827,1.337 h3
  text "! Warning ! /  / HIGH VOLTAGE /  / Read instructions carefully before touching or installing /  / Do NOT TOUCH the board when HV is live" at 93.126,1.097 h4